# Altium PCB PSU.PcbDoc
Units mm, origin at the board's own origin, x right, y up, seen from the top; angles counter-clockwise.
Board outline 56 x 56 mm, 2 copper layers (Top Layer, Bottom Layer); 50 components, 28 nets, 179 pads, 175 vias.
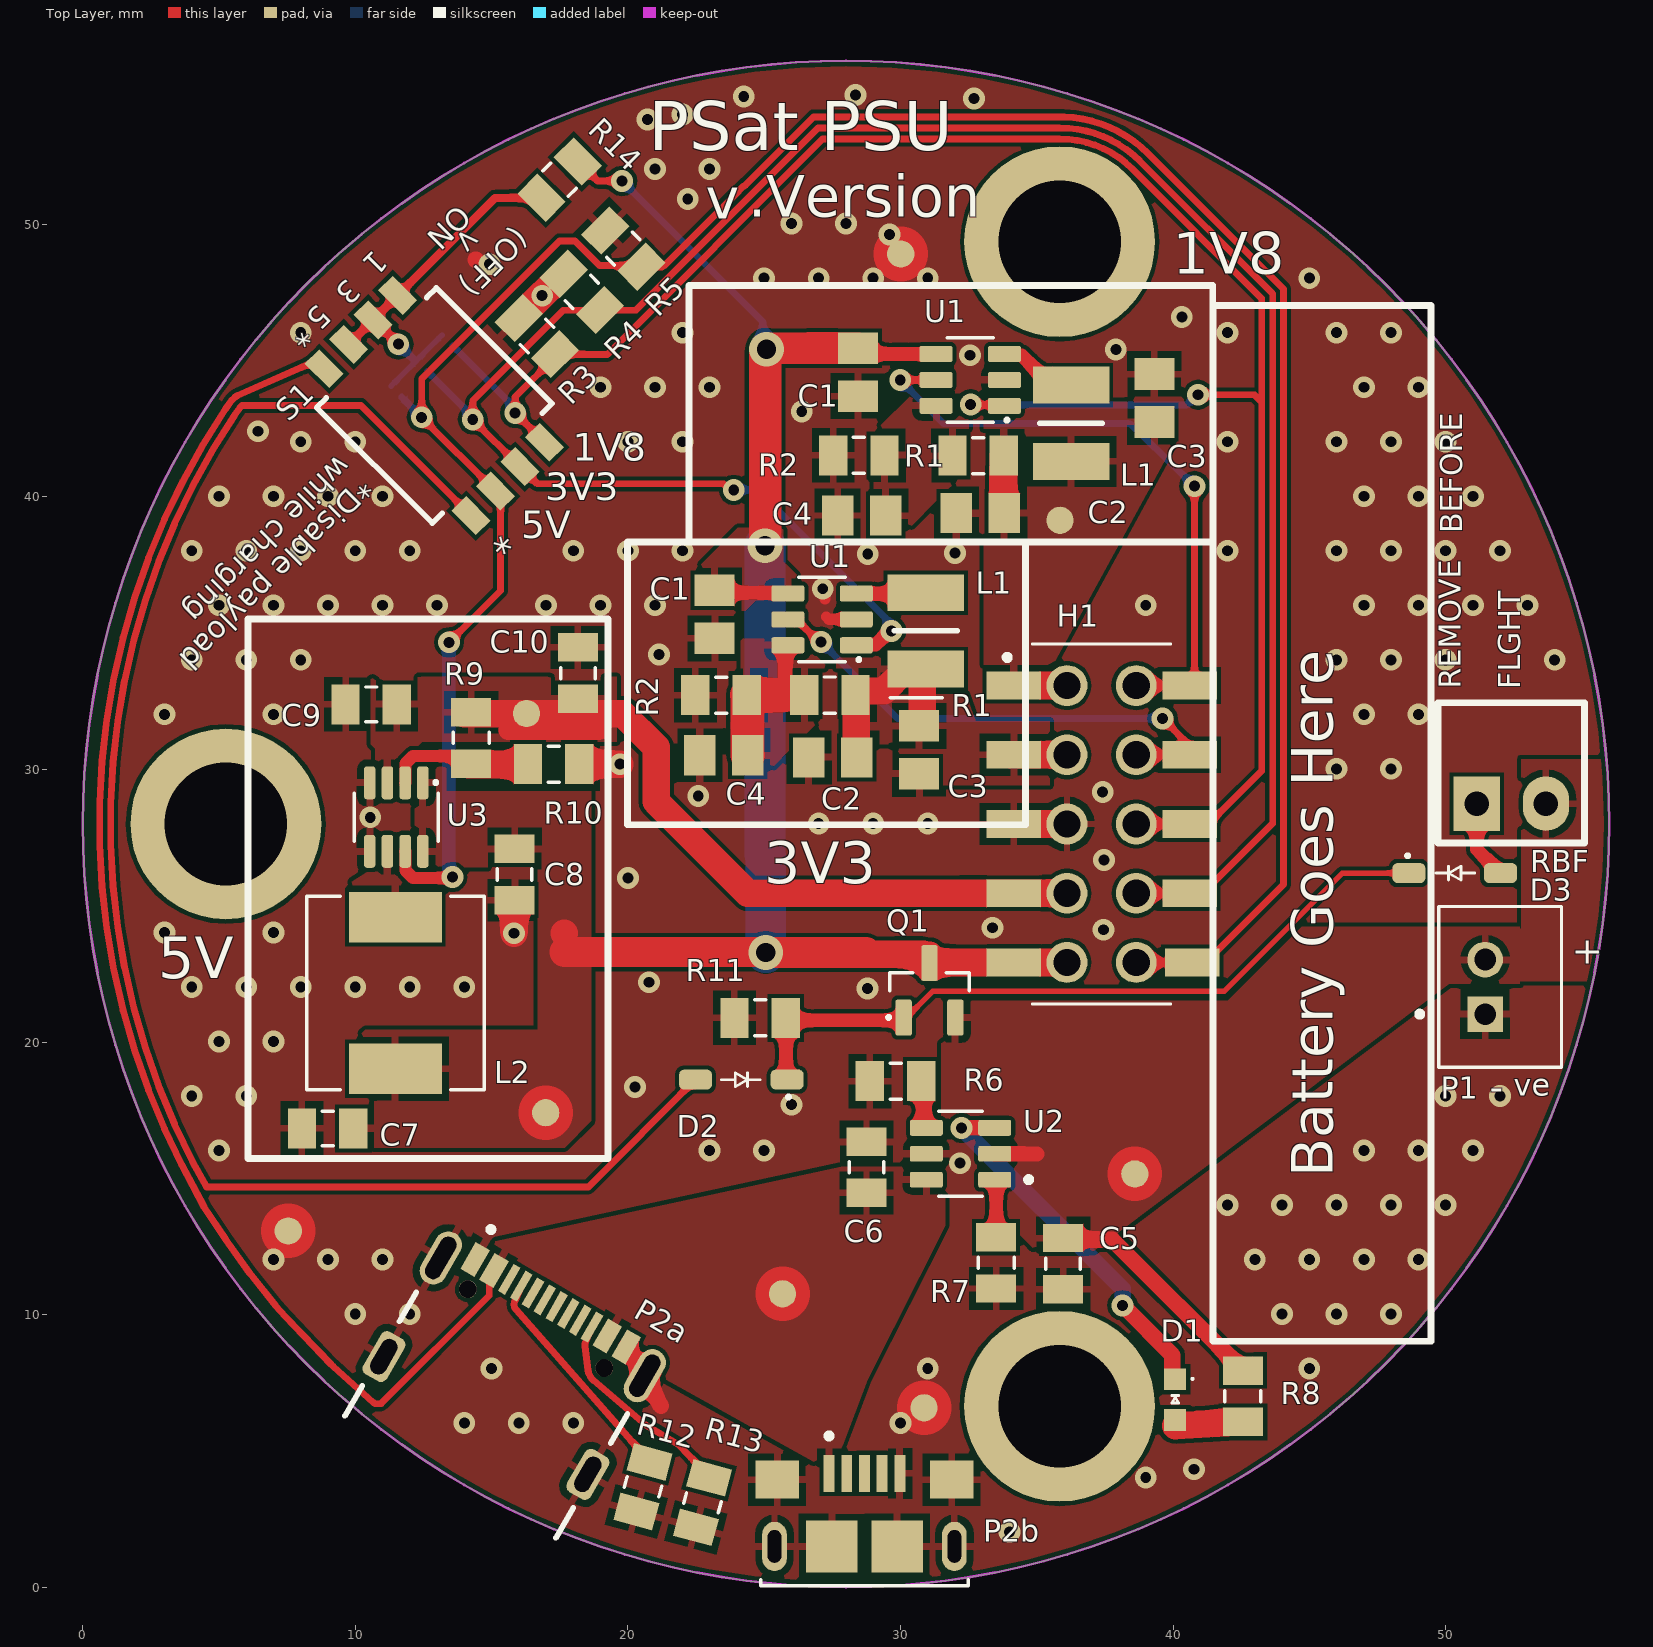
[diagram p0: Top Layer view]
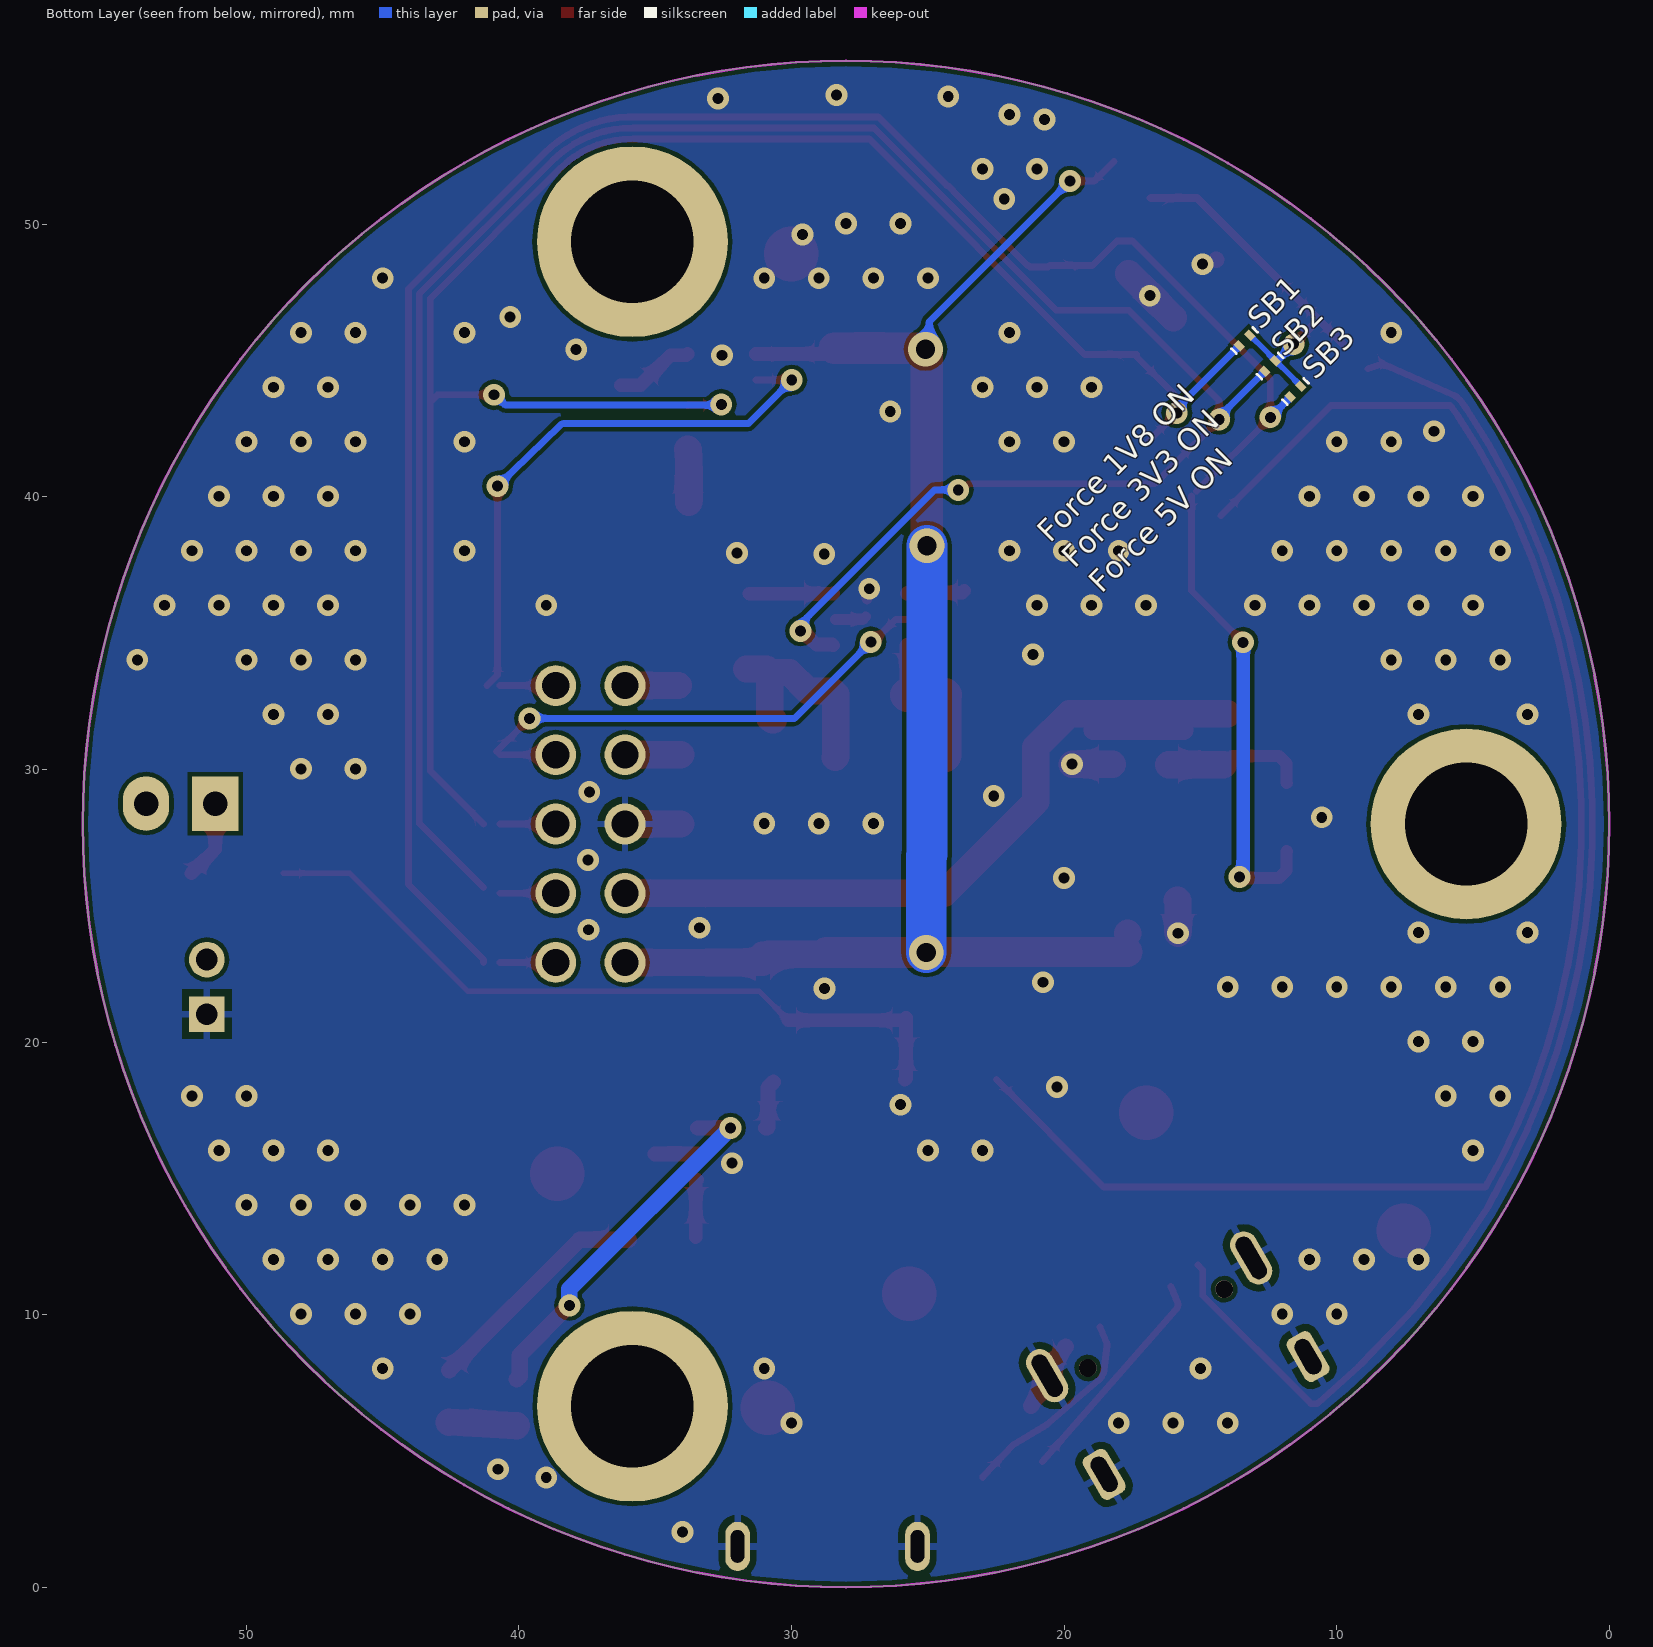
[diagram p1: Bottom Layer view, seen from below]
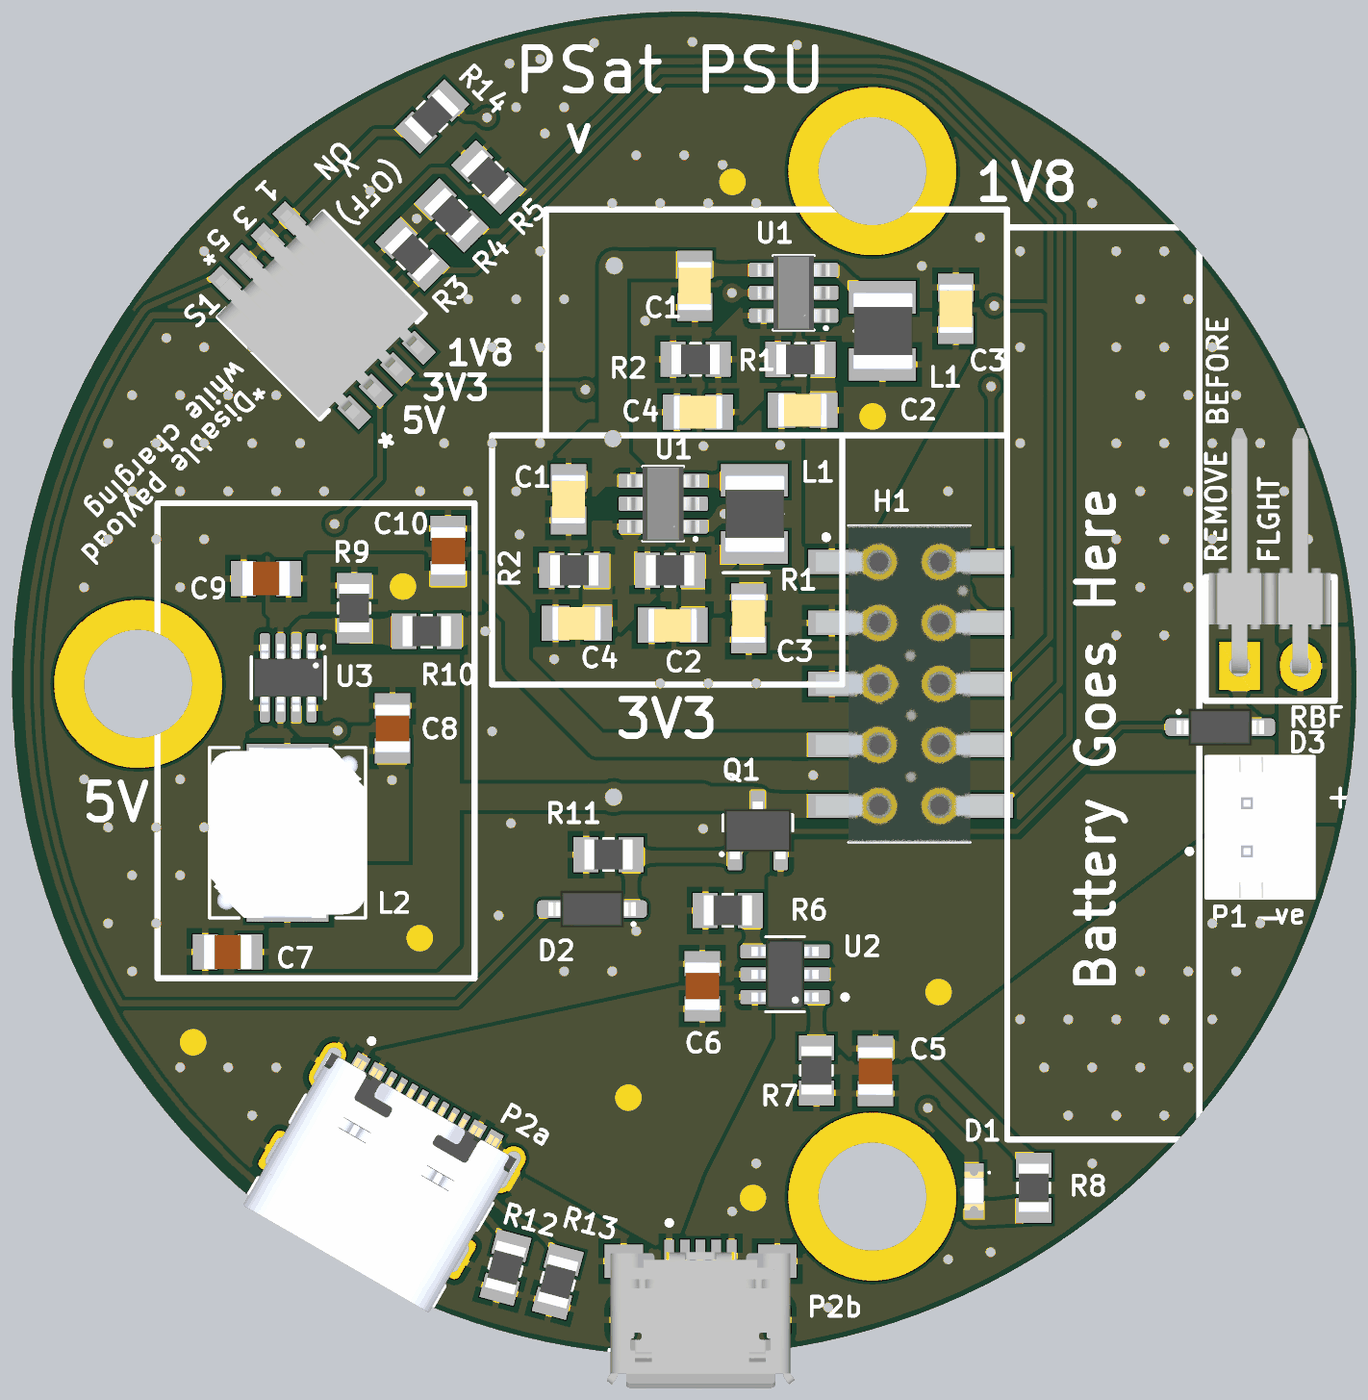
[diagram p2: 3D render of the assembled board from above, using the file's embedded part models]

## Layer stack, top to bottom
Top Solder: solder mask 0.0102, Solder Resist, Dk 3.5
Top Layer: signal copper 0.0356
Dielectric 1: dielectric 0.32, FR-4, Dk 4.8
Bottom Layer: signal copper 0.0356
Bottom Solder: solder mask 0.0102, Solder Resist, Dk 3.5

## Board outline
28,0 cw(c28,28) 0,28 cw(c28,28) 28,56 cw(c28,28) 56,28 cw(c28,28)

## Design rules (kind name [scope] priority, off if disabled: settings)
Clearance [All] p1: gap=0.152 ignorepadtopadclearanceinfootprint=FALSE
HoleSize [All] p1: absolutevalues=TRUE maxlimit=6.2 minlimit=0.3 maxpercent=80.000 minpercent=20.000
MinimumAnnularRing [All] p1: minimumring=0.15
MinimumSolderMaskSliver [All] p1: minsoldermaskwidth=0.1
PolygonConnect ViaConnect [IsVia] p1: connectstyle=Direct reliefconductorwidth=0.254 reliefentries=4 polygonreliefangle="90 Angle" airgapwidth=0.254
PolygonConnect [All] p2: connectstyle=Relief reliefconductorwidth=0.254 reliefentries=4 polygonreliefangle="90 Angle" airgapwidth=0.254
RoutingVias [All] p1: holewidth=0.3 width=0.6 viastyle="Through Hole" minholewidth=0.3 minwidth=0.5 maxholewidth=1 maxwidth=5
SilkToSilkClearance [All] p1: silktosilkclearance=0.1
SilkToSolderMaskClearance [IsPad] p1: minsilkscreentomaskgap=0.1 clearancetoexposedcopper=TRUE
SolderMaskExpansion [All] p1: expansion=0.051 istentingtop=FALSE
Width [All] p1: maxlimit=25.4 minlimit=0.15 preferedwidth=0.3
26 further rules are at their usual default settings.

## Classes and differential pairs
component class 5V: C7 C8 C9 C10 L2 R9 R10 U3
component class "U_Battery charger": C5 C6 D1 R6 R7 R8 U2
channel class "Step-down converter": 1V8 3V3
component class Main: D2 D3 H1 P1 P2a P2b Q1 R3 R4 R5 R11 R12 R13 R14 RBF S1 SB1 SB2 SB3

## Components (designator, comment, footprint, x,y, rotation, side; value= is the part's Value field where it differs from the comment)
C1 "22uF" CAPC2012X94N 23.179,35.692 r90 top
C1 "22uF" CAPC2012X94N 28.437,44.578 r90 top
C2 "22uF" CAPC2012X94N 27.517,30.443 r0 top
C2 "22uF" CAPC2012X94N 32.928,39.404 r0 top
C3 "22uF" CAPC2012X94N 30.681,30.723 r90 top
C3 "22uF" CAPC2012X94N 39.315,43.627 r270 top
C4 "22pF" CAPC2012X94N 23.516,30.522 r0 top
C4 "22pF" CAPC2012X94N 28.574,39.317 r0 top
C5 "2.2uF" CAPACITOR_0805_2012M-70N 35.966,11.873 r90 top
C6 "2.2uF" CAPACITOR_0805_2012M-70N 28.751,15.407 r270 top
C7 "22uF" CAPACITOR_0805_2012M-70N 8.982,16.834 r0 top
C8 "22uF" CAPACITOR_0805_2012M-70N 15.845,26.147 r90 top
C9 "22uF" CAPACITOR_0805_2012M-70N 10.578,32.391 r0 top
C10 "22uF" CAPACITOR_0805_2012M-70N 18.163,33.538 r270 top
D1 "LTST-C190 Series" LED_0603_1608M_0.80MM 40.075,6.882 r270 top
D2 "SS0520_R1_00001" SOD123-1.35MM-N 24.162,18.621 r180 top
D3 "SS0520_R1_00001" SOD123-1.35MM-N 50.33,26.2 r0 top
H1 "RS2BE-10-G-SMT" RS2BE10GSMT 37.377,28 r270 top
L1 "DFE322520F-2R2M=P2" INDC3225X200N 30.923,35.082 r90 top
L1 "DFE322520F-2R2M=P2" INDC3225X200N 36.259,42.701 r90 top
L2 "SPM6530T-1R5M100" IND_SPM6530T-1R5M100 11.472,21.8 r90 top
P1 "B2B-PH-K-S(LF)(SN)" JST_B2B-PH-K-S(LF)(SN) 51.997,22.024 r270 top
P2a "USB4105-GF-A" GCT_USB4105-GF-A 14.789,6.302 r330 top
P2b "10118193-0001LF" AMPHENOL_10118193-0001LF 28.677,1.5 r0 top
Q1 "SSM3J328R,LF" SOT23F-3-0.8MM 31.063,21.896 r90 top
R1 "200k" RESISTOR_0805_2012M-50N 32.845,41.517 r0 top
R1 "910k" RESISTOR_0805_2012M-50N 27.41,32.732 r0 top
R2 "200k" RESISTOR_0805_2012M-50N 23.416,32.726 r0 top
R2 "100k" RESISTOR_0805_2012M-50N 28.474,41.521 r0 top
R3 "1Meg" RESISTOR_0805_2012M-50N 16.663,45.901 r315 top
R4 "1Meg" RESISTOR_0805_2012M-50N 18.309,47.52 r315 top
R5 "1Meg" RESISTOR_0805_2012M-50N 19.831,49.106 r315 top
R6 "560" RESISTOR_0805_2012M-50N 29.817,18.565 r0 top
R7 "10k" RESISTOR_0805_2012M-50N 33.508,11.899 r90 top
R8 "1.5k" RESISTOR_0805_2012M-50N 42.561,7.007 r90 top
R9 "910k" RESISTOR_0805_2012M-50N 14.248,31.156 r90 top
R10 "100k" RESISTOR_0805_2012M-50N 17.272,30.195 r180 top
R11 "1Meg" RESISTOR_0805_2012M-50N 24.847,20.889 r0 top
R12 "5.1k" RESISTOR_0805_2012M-50N 20.554,3.688 r75 top
R13 "5.1k" RESISTOR_0805_2012M-50N 22.734,3.104 r75 top
R14 "1.5k" RESISTOR_0805_2012M-50N 17.494,51.637 r225 top
RBF "" ECE-600102STTH-RA 51.139,28.748 r90 top
S1 "TDP04H1SBD1" TDP04H1SBD1 12.899,43.352 r225 top
SB1 "Solder Jumper Normally Open 0201" "SOLDER BRIDGE OPEN 0201" 13.38,45.738 r315 bottom
SB2 "Solder Jumper Normally Open 0201" "SOLDER BRIDGE OPEN 0201" 12.445,44.803 r315 bottom
SB3 "Solder Jumper Normally Open 0201" "SOLDER BRIDGE OPEN 0201" 11.51,43.868 r315 bottom
U1 "AP3445LW6-7" SOT23-6N-1.4MM 32.559,44.291 r180 top
U1 "AP3445LW6-7" SOT23-6N-1.4MM 27.124,35.506 r180 top
U2 "BQ21040DBVR" SOT95P280X145-6N 32.201,15.902 r180 top
U3 "RT4812GJ8F" SOT28-8N-1.45mm 11.502,28.255 r270 top

## Footprints (in the part's own frame and the unit in brackets; to place one, negate y for a bottom-side part, rotate by r counter-clockwise, add the part's x,y. Pads: shape width x height; smd on the part's side, far side on the other; paste and mask are expansions set on the pad)
AMPHENOL_10118193-0001LF [mm]
  rect 0.4x1.35 smd: 1(-1.3,2.675) 2(-0.65,2.675) 3(0,2.675) 4(0.65,2.675) 5(1.3,2.675)
  rect 1.6x1.4 smd: S1(-3.2,2.45) S2(3.2,2.45)
  rect 1.9x1.9 smd: S3(1.2,0) S4(-1.2,0)
  oval 0.9x1.8 hole 0.5 slot 1.2 at 90 deg: S5(-3.3,0) S6(3.3,0)
  silkscreen extent -3.8,-1.45 3.8,4.15, body extent -3.94,-2.83 3.93,2.83, height 2.85
CAPACITOR_0805_2012M-70N [mm] "Capacitor, 0805 (2012 metric), 0.7mm high, nominal pads,"
  rect 1.04x1.47 smd mask+0.051: 1(-0.94,0) 2(0.94,0)
  silkscreen extent -0.2,-0.64 0.2,0.64, body extent -1,-0.73 1,0.73, height 1.23
CAPC2012X94N [mm]
  rect 1.16x1.47 smd: 1(-0.88,0) 2(0.88,0)
  body extent -1.02,-0.7 1.02,0.7, height 1.23
ECE-600102STTH-RA [mm] "Polarised Header 2 way"
  rect 2x1.7 hole 0.9: 1(0,0)
  oval 2x1.7 hole 0.9: 2(0,-2.54)
  silkscreen extent -1.45,-3.96 3.7,1.42, body extent -0.31,-3.8 9.91,1.28, height 1.9
GCT_USB4105-GF-A [mm]
  rect 0.6x1.15 smd mask+0.049: A1_B12(-3.2,4.755) A4_B9(-2.4,4.755) B1_A12(3.2,4.755) B4_A9(2.4,4.755)
  rect 0.3x1.15 smd mask+0.049: A5(-1.25,4.755) A6(-0.25,4.755) A7(0.25,4.755) A8(1.25,4.755) B5(1.75,4.755) B6(0.75,4.755) B7(-0.75,4.755) B8(-1.75,4.755)
  oval 1x2.1 hole 0.6 slot 1.7 at 90 deg: SH1(-4.32,4.18) SH2(4.32,4.18)
  rrect50% 1x1.8 hole 0.6 slot 1.4 at 90 deg: SH3(-4.32,0) SH4(4.32,0)
  round 0.65 hole 0.65 unplated mask+0.051: ""(-2.89,3.68) ""(2.89,3.68)
  silkscreen extent -4.47,-2.6 4.47,6.1, body extent -4.47,-2.6 4.47,5.11, height 3.31
IND_SPM6530T-1R5M100 [mm]
  rect 1.85x3.4 smd: 1(-2.775,0) 2(2.775,0)
  silkscreen extent -3.55,-3.25 3.55,3.25, body extent -3.55,-3.25 3.55,3.25, height 3
INDC3225X200N [mm]
  rect 1.35x2.8 smd: 1(-1.4,0) 2(1.4,0)
  silkscreen extent 0,-1.15 0,1.15, body extent -1.6,-1.27 1.6,1.23, height 2
JST_B2B-PH-K-S(LF)(SN) [mm]
  rect 1.308x1.308 hole 0.8: 1(1,-0.55)
  round 1.308 hole 0.8: 2(-1,-0.55)
  silkscreen extent -2.95,-3.05 2.95,2.25, body extent -2.95,-2.25 2.95,2.25, height 6
LED_0603_1608M_0.80MM [mm] "LED, 0603 (1608 metric), 0.8mm high"
  rect 0.8x0.8 smd mask+0.051: A(0.75,0) C(-0.75,0)
  silkscreen extent -0.79,-0.12 0.13,0.66, body extent -0.8,-0.4 0.8,0.4, height 0.8
RESISTOR_0805_2012M-50N [mm] "Resistor, 0805 (2012 metric), nominal pads"
  rect 1.04x1.47 smd mask+0.051: 1(-0.94,0) 2(0.94,0)
  silkscreen extent -0.2,-0.66 0.2,0.66, body extent -1,-0.63 1,0.62, height 0.5
RS2BE10GSMT [mm]
  rect 1.02x2 smd: 1(-5.08,-3.225) 2(-5.08,3.225) 3(-2.54,-3.225) 4(-2.54,3.225) 5(0,-3.225) 6(0,3.225) 7(2.54,-3.225) 8(2.54,3.225) 9(5.08,-3.225) 10(5.08,3.325)
  round 1.5 hole 1: MH1(-5.08,-1.27) MH2(-5.08,1.27) MH3(-2.54,1.27) MH4(-2.54,-1.27) MH5(0,-1.27) MH6(0,1.27) MH7(2.54,1.27) MH8(2.54,-1.27) MH9(5.08,-1.27) MH10(5.08,1.27)
  silkscreen extent -6.6,-3.51 6.6,2.54, body extent -6.6,-3.9 6.6,3.9, height 5.15
SOD123-1.35MM-N [mm] "SOD-123, 1.35mm high, nominal pads"
  rrect50% 1.21x0.73 smd mask+0.051: A(1.68,0) C(-1.68,0)
  silkscreen extent -1.75,-0.25 0.74,0.66, body extent -1.83,-0.78 1.82,0.77, height 1.5
"SOLDER BRIDGE OPEN 0201" [mm]
  rect 0.25x0.35 smd paste-100 mask+0: 1(-0.275,0) 2(0.275,0)
  silkscreen extent -0.55,-0.12 0.55,0.12
SOT23-6N-1.4MM [mm] "SOT23, 6 pins, nominal pads, 1.4mm high"
  rrect25% 1.21x0.59 smd mask+0.051: 1(-1.255,0.95) 2(-1.255,0) 3(-1.255,-0.95) 4(1.255,-0.95) 5(1.255,0) 6(1.255,0.95)
  silkscreen extent -1.37,-1.55 0.85,1.55, body extent -1.5,-1.55 1.5,1.55, height 1.4
SOT23F-3-0.8MM [mm] "SOT23, 3-pin, flat leads, 0.8mm high"
  rrect25% 1.32x0.6 smd mask+0.051: 1(-1,0.95) 2(-1,-0.95) 3(1,0)
  silkscreen extent -1.02,-1.45 0.65,1.52, body extent -1.2,-1.4 1.2,1.4, height 0.88
SOT28-8N-1.45mm [mm] "SOT28, 8 pin, 1.45mm high, nominal pads"
  rrect50% 1.21x0.42 smd mask+0.051: 1(-1.255,0.975) 2(-1.255,0.325) 3(-1.255,-0.325) 4(-1.255,-0.975) 5(1.255,-0.975) 6(1.255,-0.325) 7(1.255,0.325) 8(1.255,0.975)
  silkscreen extent -1.3,-1.54 0.88,1.54, body extent -1.4,-1.45 1.4,1.45, height 1.45
SOT95P280X145-6N [mm]
  rrect25% 1.21x0.58 smd: 1(-1.255,0.95) 2(-1.255,0) 3(-1.255,-0.95) 4(1.255,-0.95) 5(1.255,0) 6(1.255,0.95)
  silkscreen extent -2.6,-1.56 0.8,1.56, body extent -1.4,-1.45 1.4,1.45, height 1.45
TDP04H1SBD1 [mm]
  rect 0.76x1.27 smd: 1(-1.905,-3.81) 2(-0.635,-3.81) 3(0.635,-3.81) 4(1.905,-3.81) 5(1.905,3.81) 6(0.635,3.81) 7(-0.635,3.81) 8(-1.905,3.81)
  silkscreen extent -3.11,-3 3.11,3, body extent -3.08,-4.14 3.12,3.98, height 4.36

## Part data
C1 C1 C2 C2 C3 C3 C4 C4: library part "CAP 0805", "No Description Available", IsInLabBook=Yes
C5 C6: library part C0805C225K8PACTU, "Passive - Capacitor, X5R, 2.2uF Max, 10V, 0805 (2012 Metric), ±10%, -55°C ~ 85°C. 2uF @ 5V, 1.1uF @ 10V", Capacitance at Rated Voltage=50%, Package=0805, Rated Voltage=10V, Supplier 1 Part No.=399-C0805C225K8PAC7800-ND, Temp Range="-55°C ~ 85°C", Temperature Coefficient=X5R, Tolerance=±10%, APSS Standard Part="APSS Standard", MF Part No.=C0805C225K8PACTU, Supplier 1=Digikey
C7 C8 C9 C10: library part C0805C226M9PACTU, "Passive - Capacitor, X5R, 22uF Max, 6.3V, 0805 (2012 Metric), ±20%, -55°C ~ 85°C. 8.8uF @ 5V", Capacitance at Rated Voltage=30%, Package=0805, Rated Voltage=6.3V, Supplier 1 Part No.=399-C0805C226M9PAC7800CT-ND, Temp Range="-55°C ~ 85°C", Temperature Coefficient=X5R, Tolerance=±20%, APSS Standard Part="APSS Standard", MF Part No.=C0805C226M9PACTU, Supplier 1=Digikey
D1: "Diode - LED, 0603", Colour=Green, MF Part No.=LTST-C190KGKT, Package=0603, Rated Voltage="5V Reverse", Supplier 1 Part No.=160-1435-1-ND, Temp Range="-30°C ~ 85°C", APSS Standard Part="APSS Standard", Supplier 1=Digikey
D2 D3: "Diode - Low Forward Voltage, Schottky, 385 mV @ 500 mA, 75 µA Reverse @ 10 V, SOD-123", Package=SOD-123, Rated Voltage="20V Reverse", Supplier 1 Part No.=3757-SS0520_R1_00001CT-ND, Temp Range="-55°C ~ 125°C", APSS Standard Part="APSS Standard", MF Part No.=SS0520_R1_00001, Supplier 1=Digikey
H1: "Receptacle Strip 10P 2.54mm Pitch SMT", Supplier 1 Part No.=2057-RS2BE-10-G-SMT-ND, MF Part No.=RS2BE-10-G-SMT, Supplier 1=Digikey
L1 L1: "2.2 H Shielded Wirewound Inductor 3.3 A 40mOhm Max 1210 (3225 Metric)", Manufacturer_Name="Murata Electronics", Manufacturer_Part_Number=DFE322520F-2R2M=P2, Datasheet Link=https://www.murata.com/-/media/webrenewal/support/library/catalog/products/inductor/chip/o05e.ashx?la=en-us, Geometry.Height=2mm
L2: "1.5 ÂµH Shielded Drum Core, Wirewound Inductor 11 A 10.67mOhm Max Nonstandard", Supplier 1 Part No.=445-3881-2-ND, MF=TDK, MF Part No.=SPM6530T-1R5M100, Supplier 1=Digikey
P1: "Connector Header Through Hole 2 position 0.079 (2.00mm)", MF Part No.="B2B-PH-K-S (LF)(SN)", Supplier 1 Part No.=455-1704-ND, Supplier 1=Digikey
P2a: "USB-C (USB TYPE-C) USB 2.0 Receptacle Connector 24 (16+8 Dummy) Position Surface Mount, Right Angle; Through Hole", Supplier 1 Part No.=2073-USB4105-GF-ACT-ND, MF Part No.=USB4105-GF-A, Supplier 1=Digikey
P2b: "Micro USB 2.0, Input Output Connectors, B TYPE RECEPTACLE", MF="Amphenol ICC", MF Part No.=10118193-0001LF
Q1: "Transistor - MOSFET, P-Channel SSM3J328R,LF", Package=SOT23-3, Power=1W, Rated Voltage="20 Vds", Supplier 1 Part No.=SSM3J328RLFCT-ND, Temp Range="0°C ~ 150°C (TJ)", APSS Standard Part="APSS Standard", MF Part No.=SSM3J328R,LF, Supplier 1=Digikey
R1 R1 R2 R2: library part "Res 0805", "Resistor", IsInLabBook=Check
R3 R4 R5 R11: library part "RMCF0805JT Series", "Passive - Resistor Series, 0805, 5%, 100m - 22M, E24, 0.063W, 1/16W, ±200ppm/°C, -55°C ~ 155°C, 0805 (2012 Metric)", MF Part No.=RMCF0805JT1M00, Package=0805, Power=1/8W, Rated Voltage=150V, Temp Range="-55°C ~ 155°C", Temperature Coefficient=±200ppm/°C, Tolerance=5%, Value Range="100m ~ 22M", APSS Standard Part="APSS Standard", E Series=E24, Supplier 1=Digikey
R6: library part "RMCF0805JT Series", "Passive - Resistor Series, 0805, 5%, 100m - 22M, E24, 0.063W, 1/16W, ±200ppm/°C, -55°C ~ 155°C, 0805 (2012 Metric)", MF Part No.=RMCF0805JT560R, Package=0805, Power=1/8W, Rated Voltage=150V, Temp Range="-55°C ~ 155°C", Temperature Coefficient=±200ppm/°C, Tolerance=5%, Value Range="100m ~ 22M", APSS Standard Part="APSS Standard", E Series=E24, Supplier 1=Digikey
R7: library part "RMCF0805JT Series", "Passive - Resistor Series, 0805, 5%, 100m - 22M, E24, 0.063W, 1/16W, ±200ppm/°C, -55°C ~ 155°C, 0805 (2012 Metric)", MF Part No.=RMCF0805JT10K0, Package=0805, Power=1/8W, Rated Voltage=150V, Temp Range="-55°C ~ 155°C", Temperature Coefficient=±200ppm/°C, Tolerance=5%, Value Range="100m ~ 22M", APSS Standard Part="APSS Standard", E Series=E24, Supplier 1=Digikey
R8 R14: library part "RMCF0805JT Series", "Passive - Resistor Series, 0805, 5%, 100m - 22M, E24, 0.063W, 1/16W, ±200ppm/°C, -55°C ~ 155°C, 0805 (2012 Metric)", MF Part No.=RMCF0805JT1K50, Package=0805, Power=1/8W, Rated Voltage=150V, Temp Range="-55°C ~ 155°C", Temperature Coefficient=±200ppm/°C, Tolerance=5%, Value Range="100m ~ 22M", APSS Standard Part="APSS Standard", E Series=E24, Supplier 1=Digikey
R9: library part "RG2012P-xxx-D-T5 Series", "Passive - Resistor Series, 0805, 0.5%, 10 - 1M, E24, 0.063W, 1/8W, ±25ppm/°C, -55°C ~ 155°C, 0805 (2012 Metric)", MF Part No.=RG2012P-914-D-T5, Package=0805, Power=1/8W, Rated Voltage=150V, Temp Range="-55°C ~ 155°C", Temperature Coefficient=±25ppm/°C, Tolerance=0.5%, Value Range="10 ~ 1M", APSS Standard Part="APSS Standard", E Series=E24, Supplier 1=Digikey
R10: library part "RG2012P-xxx-D-T5 Series", "Passive - Resistor Series, 0805, 0.5%, 10 - 1M, E24, 0.063W, 1/8W, ±25ppm/°C, -55°C ~ 155°C, 0805 (2012 Metric)", MF Part No.=RG2012P-104-D-T5, Package=0805, Power=1/8W, Rated Voltage=150V, Temp Range="-55°C ~ 155°C", Temperature Coefficient=±25ppm/°C, Tolerance=0.5%, Value Range="10 ~ 1M", APSS Standard Part="APSS Standard", E Series=E24, Supplier 1=Digikey
R12 R13: library part "RMCF0805JT Series", "Passive - Resistor Series, 0805, 5%, 100m - 22M, E24, 0.063W, 1/16W, ±200ppm/°C, -55°C ~ 155°C, 0805 (2012 Metric)", MF Part No.=RMCF0805JT5K10, Package=0805, Power=1/8W, Rated Voltage=150V, Temp Range="-55°C ~ 155°C", Temperature Coefficient=±200ppm/°C, Tolerance=5%, Value Range="100m ~ 22M", APSS Standard Part="APSS Standard", E Series=E24, Supplier 1=Digikey
RBF: library part "Header 2", "Short Before Flight"
S1: "Switch", Supplier 1 Part No.=CKN9426-ND, MF Part No.=TDP04H1SBD1, Supplier 1=Digikey
U1 U1: "No Description Available", Mfr_Name="Diodes Inc", Copyright="Copyright (C) 2024 Ultra Librarian. All rights reserved.", Manufacturer_Part_Number=AP3445LW6-7, RefDes=RefDes, Type=DEV
U2: "1-cell, 0.8-A Li-ion and Li-polymer battery charger", Package=SOT23-6, Supplier 1 Part No.=296-47315-1-ND, MF="Texas Instruments", MF Part No.=BQ21040DBVR, Supplier 1=Digikey
U3: "Boost Switching Regulator IC Positive Adjustable 1.8V 1 Output 2A SOT-23-8 Thin, TSOT-23-8", Package=SOT-28-8, Rated Voltage=5.5V, Supplier 1 Part No.=1028-1512-1-ND, Temp Range="-40°C ~ 85°C (TA)", APSS Standard Part="APSS Standard", MF Part No.=RT4812GJ8F, Supplier 1=Digikey
SB1 SB2 SB3: DEBUG=DEBUG

## Free pads (board coordinates)
  round 7 hole 4.5: 1(5.25,28) 1(35.837,6.643) 1(35.837,49.357)
  round 1 smd paste-10: 2(7.539,13.071) 2(16.282,32.053) 2(16.983,17.408) 2(25.672,10.763) 2(30.009,48.91) 2(30.863,6.584) 2(35.851,39.14) 2(38.597,15.163)

## Via types
v1: diameter 0.8, hole 0.4, Top Layer to Bottom Layer, tented both sides, 165 vias
v2: diameter 0.8, hole 0.4, Top Layer to Bottom Layer, tented bottom, 7 vias
v3: diameter 1.27, hole 0.711, Top Layer to Bottom Layer, tented bottom, 3 vias

## Nets (pads, with @x,y where several pads share a name; then routed paths per layer and width w, separated by ;. In a path a pad name is that pad's centre, name@x,y a point inside that pad or via, vN(x,y) a via of type N, cw(c..) or ccw(c..) an arc to the next point about the centre after c; other vN are vias at no path point)
1V8: C2.2@33.808,39.404 C3.2@39.315,42.747 H1.1 H1.MH1 L1.1@36.259,41.301 pad.2@35.851,39.14 R1.2@33.785,41.517 | length 3.9
  Top Layer w1: R1.2@33.764,41.517 33.764,39.81 C2.2@33.771,39.804 ; R1.2@33.785,41.517 33.785,41.732 R1.2@33.805,41.752 ; H1.1 H1.MH1
1V8_PG: H1.2 H1.MH2 U1.5@31.304,44.291 | length 23.2
  Top Layer w0.25: v2(29.989,44.284) 29.992,44.287 31.3,44.287 U1.5@31.304,44.291 ; H1.MH2 H1.2 H1.2@40.702,33.08 ; v2(40.785,40.393) 40.785,33.465 H1.2@41.17,33.08
  Bottom Layer w0.25: v2(29.989,44.284) 31.58,42.692 38.324,42.692 cw(c38.324,42.442) 38.499,42.621 v2(40.785,40.393)
3V3: C2.2@28.397,30.443 C3.2@30.681,31.603 H1.3 H1.MH4 L1.1@30.923,33.682 R1.2@28.35,32.732 | length 9.8
  Top Layer w1: C2.2@28.397,30.443 28.379,30.462 28.379,32.75 28.51,32.882 29.398,32.882 30.073,33.557 L1.1@30.798,33.557 ; C3.2@30.673,31.814 30.718,31.814 30.798,31.894 L1.1@30.798,33.557 ; L1.1@31.648,33.682 30.923,33.682 L1.1@30.798,33.557 ; H1.3@34.052,30.54 H1.3 H1.MH4
3V3_PG: H1.4 H1.MH3 U1.5@25.869,35.506 | length 19.1
  Top Layer w0.25: U1.5@25.771,35.506 25.869,35.506 26.179,35.506 27.003,34.682 v1(27.089,34.682) ; H1.MH3 H1.4 H1.4@40.702,30.54 ; v2(39.61,31.875) H1.4@40.823,30.661
  Bottom Layer w0.25: v1(27.089,34.682) 29.896,31.875 v2(39.61,31.875)
5V: C9.2 C10.2 H1.7 H1.MH8 pad.2@16.282,32.053 R9.2 U3.3 | length 30.6
  Top Layer w0.7: 15.605,31.44 18.936,31.44
  Top Layer w1: R9.2@14.007,32.047 16.282,32.047 17.51,32.047 ; pad.2@16.282,32.053 17.51,32.047 ; H1.MH8 H1.7 24.398,25.46 21.037,28.821 21.037,30.812 19.801,32.047 17.51,32.047
EN_1V8: H1.6 H1.MH6 R3.2 S1.8 SB1.2 U1.1@33.814,43.341 | length 73.6
  Top Layer w0.25: S1.8 v1(15.863,43.083) 15.863,43.665 17.334,45.136 17.334,45.229 19.243,45.229 27.143,53.13 28.74,53.13 28.745,53.135 35.837,53.135 cw(c35.837,49.357) 38.508,52.028 43.25,47.286 43.25,43.481 ; v1(32.574,43.395) 32.601,43.368 33.787,43.368 U1.1@33.814,43.341 ; H1.MH6 H1.6 H1.6@40.702,28 ; v1(40.917,43.746) 42.985,43.746 43.25,43.481 ; H1.6@41.302,28 43.25,29.948 43.25,33.045 43.25,43.481
  Bottom Layer w0.25: SB1.2 15.863,43.255 v1(15.863,43.083) ; v1@32.506,43.366 40.496,43.366 40.876,43.746 v1(40.917,43.746)
EN_3V3: H1.8 H1.MH7 R4.2 S1.7 SB2.2 U1.1@28.379,34.556 | length 83.6
  Top Layer w0.25: v2(23.881,40.257) 23.732,40.257 23.51,40.479 16.67,40.479 S1.7 v1(14.306,42.844) 14.306,43.517 17.637,46.848 20.292,46.848 24.518,51.074 25.732,52.288 26.977,53.532 28.029,53.532 28.712,53.537 cw(c28.746,49.276) 28.746,53.537 35.837,53.537 cw(c35.837,49.357) 38.793,52.313 43.653,47.453 43.653,28.021 H1.8@41.302,25.67 ; H1.MH7 H1.8 H1.8@40.702,25.46
  Top Layer w0.5: U1.1@28.476,34.556 28.506,34.586 29.095,34.586 29.592,35.082 v1(29.673,35.082)
  Bottom Layer w0.25: SB2.2 14.306,42.942 v1(14.306,42.844) ; v2(23.881,40.257) 24.749,40.257 v1@29.616,35.39
EN_5V: H1.10 H1.MH10 R5.2 S1.6 SB3.2 U3.7 | length 90.4
  Top Layer w0.25: v2(13.431,34.664) 15.324,36.557 S1.6@15.324,40.029 ; S1.6 v1(12.434,42.919) 12.434,44.327 17.495,49.388 18.06,49.388 18.957,48.492 20.534,48.492 20.591,48.435 21.245,48.435 21.302,48.492 21.338,48.492 22.92,50.074 23.926,51.08 24.227,51.381 ccw(c24.135,51.614) 24.312,51.437 25.948,53.073 26.81,53.935 28.027,53.935 28.709,53.939 cw(c28.746,49.276) 28.746,53.94 31.396,53.94 36.004,53.94 cw(c35.838,49.36) 39.076,52.602 44.055,47.623 44.055,25.783 41.302,23.03 H1.10@41.302,22.92 ; H1.MH10 H1.10
  Top Layer w0.45: U3.7@11.827,27.005 11.842,26.99 11.842,26.291 12.116,26.017 13.534,26.017 v1(13.57,26.053)
  Bottom Layer w0.25: SB3.2 11.705,43.649 v1(12.434,42.919)
  Bottom Layer w0.5: v2(13.431,34.664) 13.431,26.272 13.57,26.134 v1(13.57,26.053)
GND: C1.1 C2.1 C3.1 C4.1 C5.1 C6.1 C7.1 C8.1 C9.1 C10.1 H1.5 H1.MH5 P1.1 P2a.A1_B12 P2a.B1_A12 P2a.SH1 P2a.SH2 P2a.SH3 P2a.SH4 P2b.5 P2b.S1 P2b.S2 P2b.S3 P2b.S4 P2b.S5 P2b.S6 pad.2@7.539,13.071 pad.2@30.009,48.91 pad.2@30.863,6.584 R2.1 R3.1 R4.1 R5.1 R6.1 R7.1 R10.1 R11.1 R12.1 R13.1 U1.2 U2.5 U3.4 U3.5 | length 11.2
  Top Layer w0.4: v2(27.147,36.631) 27.224,36.555 v2@27.224,36.256 ; 27.275,35.604 27.372,35.506 U1.2@28.379,35.506
  Top Layer w0.6: 14.411,48.704 14.424,48.704 ; P2a.B1_A12 P2a.SH2 21.212,6.653
  Top Layer w1: v1(15.823,23.993) 15.823,25.187 C8.1 C8.1 ; R3.1@15.991,46.573 16.005,46.573 17.623,48.191 R4.1@17.637,48.191 ; R10.1@18.222,30.195 v1(19.707,30.195) ; H1.5@34.052,28 H1.5 H1.MH5
  other v1: 33.997,2.024 38.997,4.024 40.768,4.329 13.997,6.024 15.997,6.024 17.997,6.024 29.997,6.024 14.997,8.024 30.997,8.024 44.997,8.024 9.997,10.024 11.997,10.024 43.997,10.024 45.997,10.024 47.997,10.024 6.997,12.024 8.997,12.024 10.997,12.024 42.997,12.024 44.997,12.024 46.997,12.024 48.997,12.024 41.997,14.024 43.997,14.024 45.997,14.024 47.997,14.024 49.997,14.024 32.185,15.558 4.997,16.024 22.997,16.024 24.997,16.024 46.997,16.024 48.997,16.024 50.997,16.024 25.997,17.704 3.997,18.024 5.997,18.024 49.997,18.024 51.997,18.024 20.263,18.353 4.997,20.024 6.997,20.024 28.786,21.968 3.997,22.024 5.997,22.024 7.997,22.024 9.997,22.024 11.997,22.024 13.997,22.024 20.778,22.193 2.997,24.024 6.997,24.024 37.445,24.121 33.372,24.194 19.997,26.024 37.46,26.684 26.997,28.024 28.997,28.024 30.997,28.024 10.547,28.245 22.58,29.028 37.416,29.171 45.997,30.024 47.997,30.024 2.997,32.024 6.997,32.024 46.997,32.024 48.997,32.024 3.997,34.024 5.997,34.024 7.997,34.024 45.997,34.024 47.997,34.024 49.997,34.024 53.997,34.024 21.137,34.219 4.997,36.024 6.997,36.024 8.997,36.024 10.997,36.024 12.997,36.024 16.997,36.024 18.997,36.024 20.997,36.024 38.997,36.024 46.997,36.024 48.997,36.024 50.997,36.024 52.997,36.024 28.798,37.908 31.999,37.946 3.997,38.024 5.997,38.024 7.997,38.024 9.997,38.024 11.997,38.024 17.997,38.024 19.997,38.024 21.997,38.024 41.997,38.024 45.997,38.024 47.997,38.024 49.997,38.024 51.997,38.024 4.997,40.024 6.997,40.024 8.997,40.024 10.997,40.024 46.997,40.024 48.997,40.024 50.997,40.024 7.997,42.024 9.997,42.024 19.997,42.024 21.997,42.024 41.997,42.024 45.997,42.024 47.997,42.024 49.997,42.024 6.425,42.409 26.375,43.13 18.997,44.024 20.997,44.024 22.997,44.024 46.997,44.024 48.997,44.024 32.551,45.198 37.899,45.408 7.997,46.024 21.997,46.024 41.997,46.024 45.997,46.024 47.997,46.024 40.319,46.599 16.854,47.382 24.997,48.024 26.997,48.024 28.997,48.024 30.997,48.024 44.997,48.024 14.917,48.538 29.598,49.624 25.997,50.024 27.997,50.024 22.194,50.924 20.997,52.024 22.997,52.024 20.722,53.841 21.997,54.024 32.699,54.617 24.248,54.691 28.343,54.743
NetC4_1V8_2: C4.2@29.454,39.317 R1.1@31.905,41.517 R2.2@29.414,41.521 U1.6@31.304,43.341
NetC4_3V3_2: C4.2@24.396,30.522 R1.1@26.47,32.732 R2.2@24.356,32.726 U1.6@25.869,34.556 | length 5.4
  Top Layer w0.5: 25.761,32.729 25.771,32.739
  Top Layer w0.55: 25.771,32.739 U1.6@25.771,34.556
  Top Layer w1.25: C4.2@24.396,30.522 24.381,30.537 24.381,32.711 24.366,32.726 24.369,32.729 25.761,32.729
NetC6_2: C6.2 P2a.A4_B9 P2a.B4_A9 P2b.1 pad.2@25.672,10.763 S1.4 U2.6 | length 51.6
  Top Layer w0.25: S1.4 8.317,44.88 5.684,43.721 ccw(c5.846,43.352) 5.562,43.637 5.474,43.549 ccw(c5.758,43.264) 5.43,43.497 5.237,43.225 5.235,43.223 5.23,43.215 4.412,41.914 3.669,40.57 3.666,40.563 3.003,39.186 3,39.179 2.415,37.766 1.908,36.316 1.482,34.84 1.14,33.343 0.883,31.828 0.711,30.302 0.625,28.768 0.625,27.232 0.711,25.698 0.883,24.172 1.14,22.657 1.482,21.16 1.908,19.684 2.415,18.234 3,16.821 3.003,16.814 3.624,15.511 4.458,13.939 5.234,12.78 6.118,11.532 7.076,10.331 7.44,9.924 9.117,8.17 9.191,8.095 10.66,6.782 10.733,6.729 10.94,6.729 11.004,6.792 14.913,10.701 14.913,11.645 P2a.A4_B9@15.088,11.82
NetD1_A: D1.A R8.1 | length 2.5
  Top Layer w1: D1.A@40.086,5.927 R8.1@42.561,6.057
NetD1_C: D1.C U2.3 | length 13.7
  Top Layer w0.55: v1(32.24,16.848) 32.242,16.85 33.451,16.85 U2.3@33.455,16.854
  Top Layer w0.6: v2(38.148,10.34) 39.975,8.513 39.975,7.732 D1.C
  Bottom Layer w0.6: v1(32.24,16.848) 38.148,10.941 v2(38.148,10.34)
NetD2_A: D2.A S1.5 | length 59.9
  Top Layer w0.25: S1.5 10.278,43.279 10.205,43.352 5.846,43.352 5.758,43.264 5.564,42.991 4.875,41.895 4.759,41.71 4.027,40.385 3.37,39.021 2.791,37.623 2.291,36.194 1.872,34.74 1.535,33.264 1.282,31.772 1.112,30.268 1.027,28.757 1.027,27.243 1.112,25.732 1.282,24.228 1.535,22.736 1.872,21.26 2.291,19.806 2.791,18.377 3.37,16.979 4.027,15.615 4.539,14.688 18.549,14.688 D2.A
NetD3_A: D3.A RBF.1 | length 2.9
  Top Layer w0.5: RBF.1 51.139,27.071 D3.A
NetL1_1V8_2: L1.2@36.259,44.101 U1.3@33.814,45.241 | length 2.9
  Top Layer w0.5: U1.3@33.814,45.241 33.859,45.196 34.44,45.196 35.534,44.101 L1.2@36.259,44.101
NetL1_3V3_2: L1.2@30.923,36.482 U1.3@28.379,36.456 | length 3.1
  Top Layer w0.5: U1.3@28.476,36.456 28.481,36.451 31.548,36.451 L1.2@31.553,36.446
NetL2_2: L2.2 U3.6
NetP2a_A5: P2a.A5 R12.2 | length 8.4
  Top Layer w0.25: P2a.A5 15.844,10.48 ccw(c16.099,10.372) 15.891,10.189 R12.2@20.8,4.606
NetP2a_B5: P2a.B5 R13.2 | length 7.7
  Top Layer w0.25: P2a.B5 18.442,8.981 ccw(c18.697,8.872) 18.422,8.837 18.534,7.967 ccw(c19.132,8.044) 18.741,7.586 20.65,5.956 20.652,5.954 ccw(c20.812,6.146) 20.685,5.931 21.847,5.239 21.876,5.222 22.981,4.068 R13.2@22.98,4.022
NetR6_2: R6.2 U2.4 | length 1.9
  Top Layer w0.5: R6.2@30.66,18.538 R6.2@30.664,18.542
  Top Layer w0.55: R6.2@30.66,18.538 30.857,18.341 30.857,16.867 30.872,16.852 U2.4
NetR7_2: R7.2 U2.1 | length 2.1
  Top Layer w0.5: U2.1 33.468,14.952 33.508,14.912 R7.2@33.508,12.849
NetR9_1: R9.1 R10.2 U3.2 | length 5.3
  Top Layer w0.45: U3.2@11.827,29.505 11.842,29.52 11.842,30.218 12.116,30.492 13.838,30.492 R9.1@14.157,30.173
  Top Layer w1: R9.1@14.157,30.173 R10.2@16.162,30.173
OutputDisable: D2.C D3.C Q1.1 R11.2 | length 27.4
  Top Layer w0.2: Q1.1@30.113,20.796 31.182,21.864 41.873,21.864 46.209,26.2 D3.C
  Top Layer w0.5: D2.C 25.797,18.666 25.797,20.889 25.891,20.796 Q1.1@30.113,20.796
Pullup: R14.2 S1.1 S1.2 S1.3 SB1.1 SB2.1 SB3.1 | length 14.1
  Top Layer w0.3: S1.3 S1.2 ; v1(11.577,45.601) 10.682,46.496 S1.2 ; R14.2@16.822,50.966 15.124,50.966 S1.2
  Bottom Layer w0.2: SB3.1 SB1.1
  Bottom Layer w0.3: v1(11.577,45.601) SB2.1@12.181,44.997
Vbat: C5.2 P1.2 pad.2@38.597,15.163 Q1.2 R8.2 RBF.2 U2.2 | length 10.1
  Top Layer w0.55: U2.2 35.007,15.902
  Top Layer w0.6: C5.2@35.966,12.753 37.765,12.753 R8.2@42.561,7.957
Vraw: C1.2 C7.2 C8.2 H1.9 H1.MH9 L2.1 pad.2@16.983,17.408 Q1.3 R14.1 U1.4 U3.1 U3.8 | length 67.1
  Top Layer w0.25: R14.1@18.166,52.309 18.884,51.591 v1(19.782,51.591)
  Top Layer w0.5: C1.2@23.663,36.561 23.739,36.486 25.742,36.486 U1.4@25.771,36.456 ; C1.2@28.437,45.458 28.654,45.241 U1.4@31.304,45.241
  Top Layer w1: 17.665,23.993 17.672,23.985 ; 28.735,23.295 28.692,23.252 28.659,23.285 v3(25.058,23.285) 25.058,23.252 25.091,23.219 30.84,23.219 30.863,23.196 31.063,23.196 31.063,22.92 H1.9 H1.MH9
  Top Layer w1.1: 17.672,23.295 28.735,23.295
  Top Layer w1.15: v3(25.085,45.42) 25.117,45.42 25.156,45.458 C1.2@28.437,45.458
  Top Layer w1.2: v3(25.029,38.214) 25.034,38.219 25.034,45.349 25.085,45.401 v3(25.085,45.42)
  Bottom Layer w0.25: v1(19.782,51.591) 24.943,46.43 24.943,45.561 v3(25.085,45.42)
  Bottom Layer w1.5: v3(25.029,38.214) 25.029,26.875 25.058,26.846 v3(25.058,23.285)
pads on no net: P2a. P2a.A6 P2a.A7 P2a.A8 P2a.B6 P2a.B7 P2a.B8 P2b.2 P2b.3 P2b.4

## Polygon pours and split planes (outlines as drawn)
GND on Top Layer "GND_L01_P018" (solid, remove dead copper, pour order 18): 0,40.083 15.865,55.947 39.705,56.384 56.475,39.613 56.44,16.508 39.933,0 15.688,0 0,15.688
Vbat on Top Layer "VBAT_L01_P013" (solid, pour order 13): 50.333,24.163 52.768,24.163 52.768,30.382 56,30.382 56,22.223 50.333,22.226
NetC6_2 on Top Layer "NETC6_2_L01_P009" (solid, pour order 9): 31.64,15.43 31.64,13.262 28.791,7.634 27.831,5.084 27.831,3.967 27.26,3.967 27.26,4.349 14.512,11.43 15.06,12.676 27.831,15.43
Vbat on Top Layer "VBAT_L01_P008" (solid, pour order 8): 31.496,21.519 42.013,21.519 44.727,24.233 52.725,24.233 52.725,22.135 50.135,22.135 36.852,12.157 35.15,12.157 31.496,15.812
5V on Top Layer "5V_L01_P007" (solid, pour order 7): 10.981,29.055 10.734,29.302 10.734,30.752 10.561,30.925 10.561,33.404 19.581,33.404 19.581,31.025 12.457,31.025 11.568,30.135 11.568,29.044
NetL2_2 on Top Layer "NETL2_2_L01_P006" (solid, pour order 6): 10.733,26.438 9.774,25.822 9.774,23.667 13.161,23.667 13.161,25.515 11.547,26.975 11.46,27.684 11.011,27.684
Vraw on Top Layer "VRAW_L01_P005" (solid, pour order 5): 12.182,26.41 16.687,26.41 16.687,20.453 10.364,20.453 9.229,19.318 9.229,16.125 17.678,16.125 18.66,17.107 18.66,29.208 13.326,29.208 13.327,30.213 12.182,30.213
Vraw on Top Layer "VRAW_L01_P010" (solid, pour order 10): 24.027,38.863 22.26,37.096 22.26,36.148 22.593,35.815 24.319,35.815 24.706,36.202 26.273,36.202 26.273,37.056 25.698,37.63 25.698,38.876
1V8 on Top Layer "1V8_L01_P000" (solid, pour order 0): 37.724,43.506 37.734,43.497 40.145,43.497 40.145,42.178 35.545,33.752 35.545,32.274 33.368,32.274 33.044,32.598 33.044,42.658 34.012,42.658 34.87,43.516 34.88,43.506 37.704,43.506
3V3 on Top Layer "3V3_L01_P003" (solid, remove dead copper, pour order 3): 32.763,31.764 35.474,31.764 35.474,29.416 31.115,29.416 29.572,30.959 29.542,30.929 28.684,30.929 27.627,31.987 27.647,32.007 27.647,34.341 31.822,34.341
NetC4_3V3_2 on Top Layer "NETC4_3V3_2_L01_P004" (solid, pour order 4): 25.272,34.8 24.137,34.81 24.137,33.666 23.778,33.27 23.778,29.793 24.966,29.793 24.99,29.768 27.255,32.033 27.255,33.828 26.273,34.81
NetC4_1V8_2 on Top Layer "NETC4_1V8_2_L01_P002" (solid, pour order 2): 30.512,43.798 30.451,43.798 28.969,42.316 29.018,42.267 29.018,38.79 30.206,38.79 30.23,38.766 32.495,41.031 32.495,42.825 31.513,43.808
GND on Bottom Layer "GND_L02_P016" (solid, remove dead copper, pour order 16): 0,57.48 1.358,58.838 57.08,58.838 57.08,1.699 55.381,0 0,0

## Keep-outs
Keep-Out Layer:
  the board outline again, w0.1

## Silkscreen, mask and mechanical layers (free items; w line width, h text height)
Top Overlay:
  lines w0.127: 29.622,32.629 31.533,32.629
  lines w0.254: 22.235,38.35 41.453,38.35 ; 22.235,38.45 22.235,47.76 41.453,47.76 41.453,38.45 ; 6.06,15.735 19.263,15.735 19.263,35.524 6.06,35.524 6.06,15.735 ; 19.991,27.972 34.582,27.972 34.582,38.35 19.991,38.35 19.991,27.972 ; 41.46,9.025 49.46,9.025 49.46,47.025 41.46,47.025 41.46,9.025
  text "PSat PSU" at 20.764,52.71 h1.8
  text "ON" at 13.766,50.749 h0.8 r225
  text ".Version" at 24.413,50.276 h1.52
  text "v" at 22.857,50.206 h1.52
  text "(OFF)" at 15.874,49.942 h0.8 r225
  text ">" at 14.653,49.348 h0.8 r135
  text "1" at 10.691,49.109 h0.8 r225
  text "1V8" at 39.993,48.187 h1.52
  text "3" at 9.708,48.036 h0.8 r225
  text "5" at 8.625,47.106 h0.8 r225
  text "*" at 7.501,45.538 h0.8 r315
  text "while charging" at 9.352,41.59 h0.8 r225
  text "1V8" at 17.985,41.318 h1
  text "*Disable payload" at 10.127,40.783 h0.8 r225
  text "3V3" at 16.969,39.872 h1
  text "BEFORE" at 50.609,38.658 h0.8 r90
  text "5V" at 16.095,38.491 h1
  text "*" at 14.663,37.953 h1 r315
  text "REMOVE" at 50.545,32.956 h0.8 r90
  text "FLGHT" at 52.743,32.949 h0.8 r90
  text "3V3" at 24.997,25.829 h1.52
  text "+" at 54.619,22.872 h1
  text "5V" at 2.763,22.35 h1.52
  text "ve" at 52.493,18.032 h0.8
  text "-" at 51.616,17.846 h1
  text "Battery Goes Here" at 45.865,15.038 h1.52 r90
Bottom Overlay:
  text "Force 1V8 ON" at 20.507,38.285 h0.8 r315
  text "Force 3V3 ON" at 19.609,37.342 h0.8 r315
  text "Force 5V ON" at 18.609,36.421 h0.8 r315

## Text inside footprints (layer, text, board x,y; h text height)
P2a: Mechanical 13 "PCB EDGE" at 17.776,1.873 h0.41 r330
P2b: Mechanical 13 "PCB END" at 33.527,0.3 h0.41